# Altium PCB single_coil_driver.PcbDoc
Units mm, origin at the board's own origin, x right, y up, seen from the top; angles counter-clockwise.
Board outline 42 x 32 mm, 2 copper layers (Top Layer, Bottom Layer), stack 1.571 mm thick; 48 components, 25 nets, 165 pads, 53 vias.
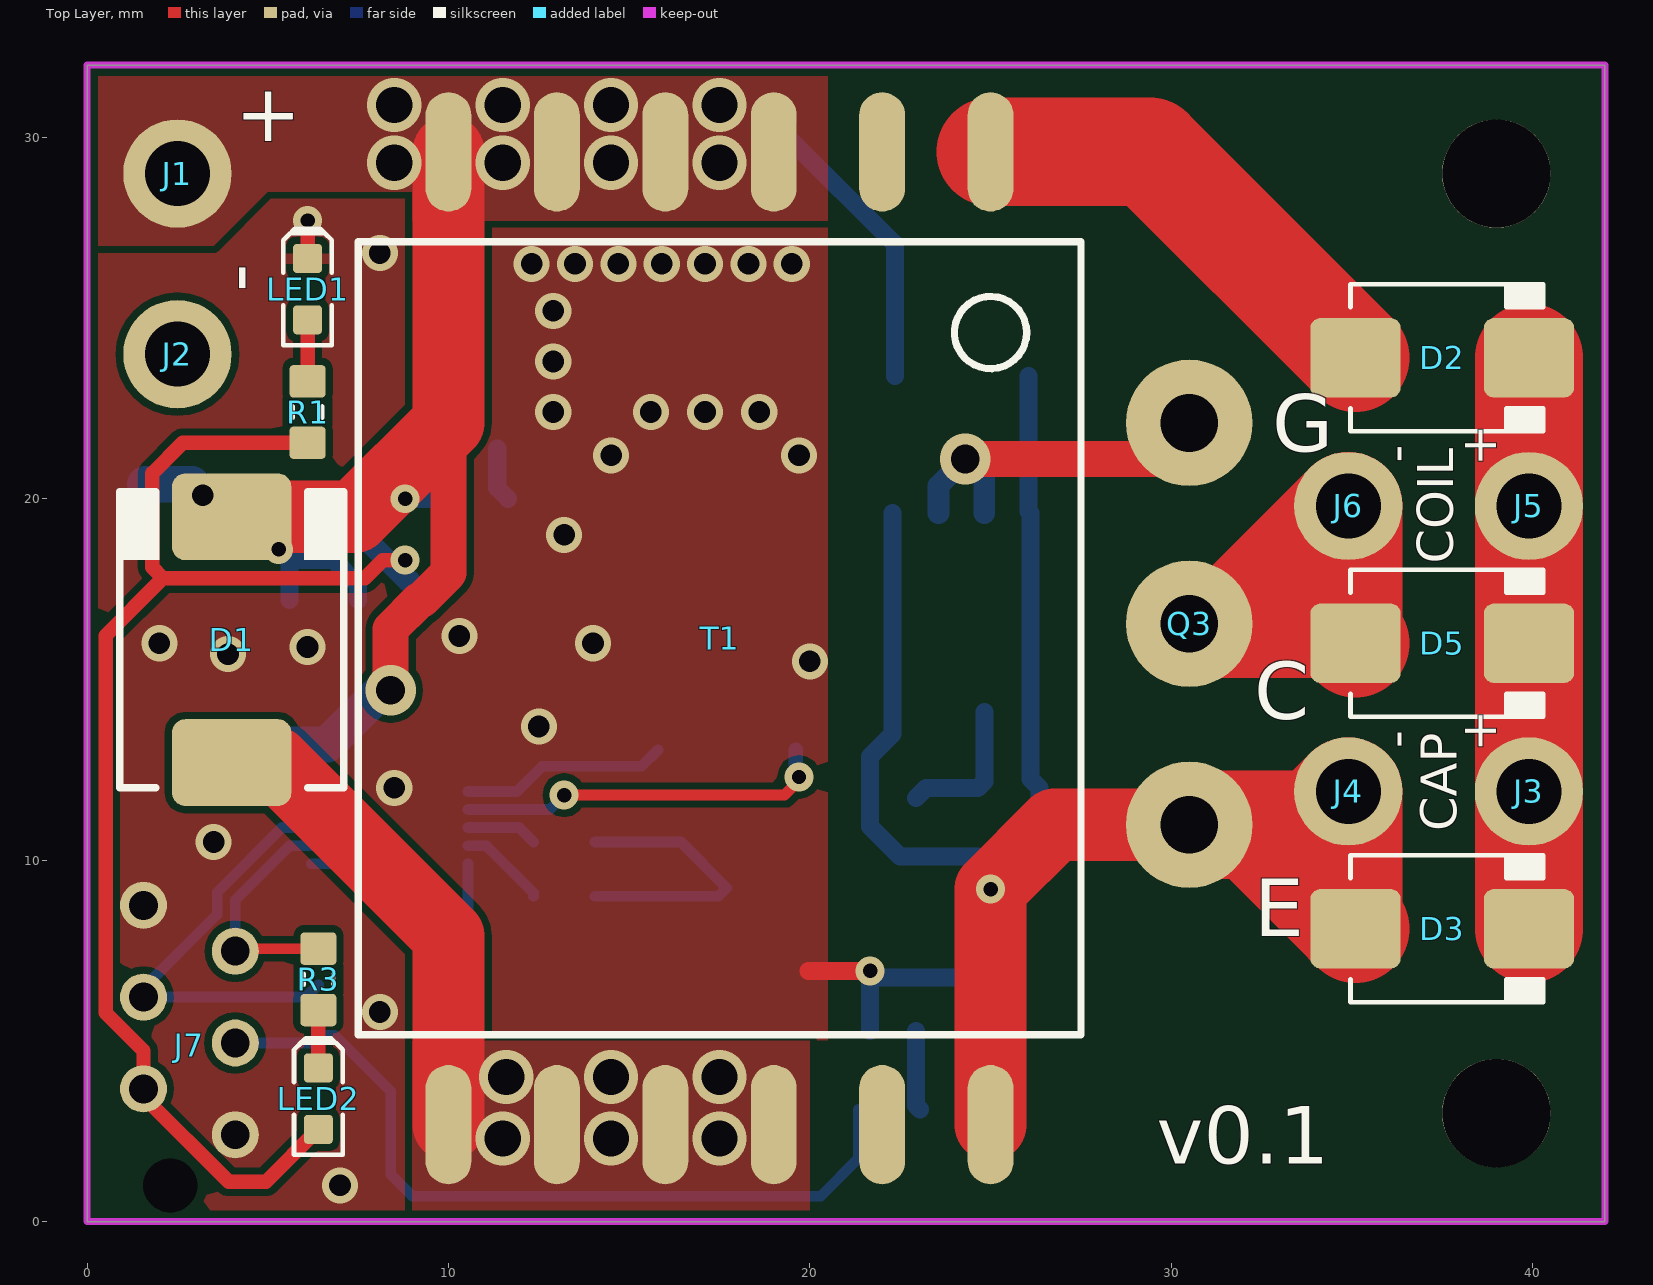
[diagram p0: Top Layer view]
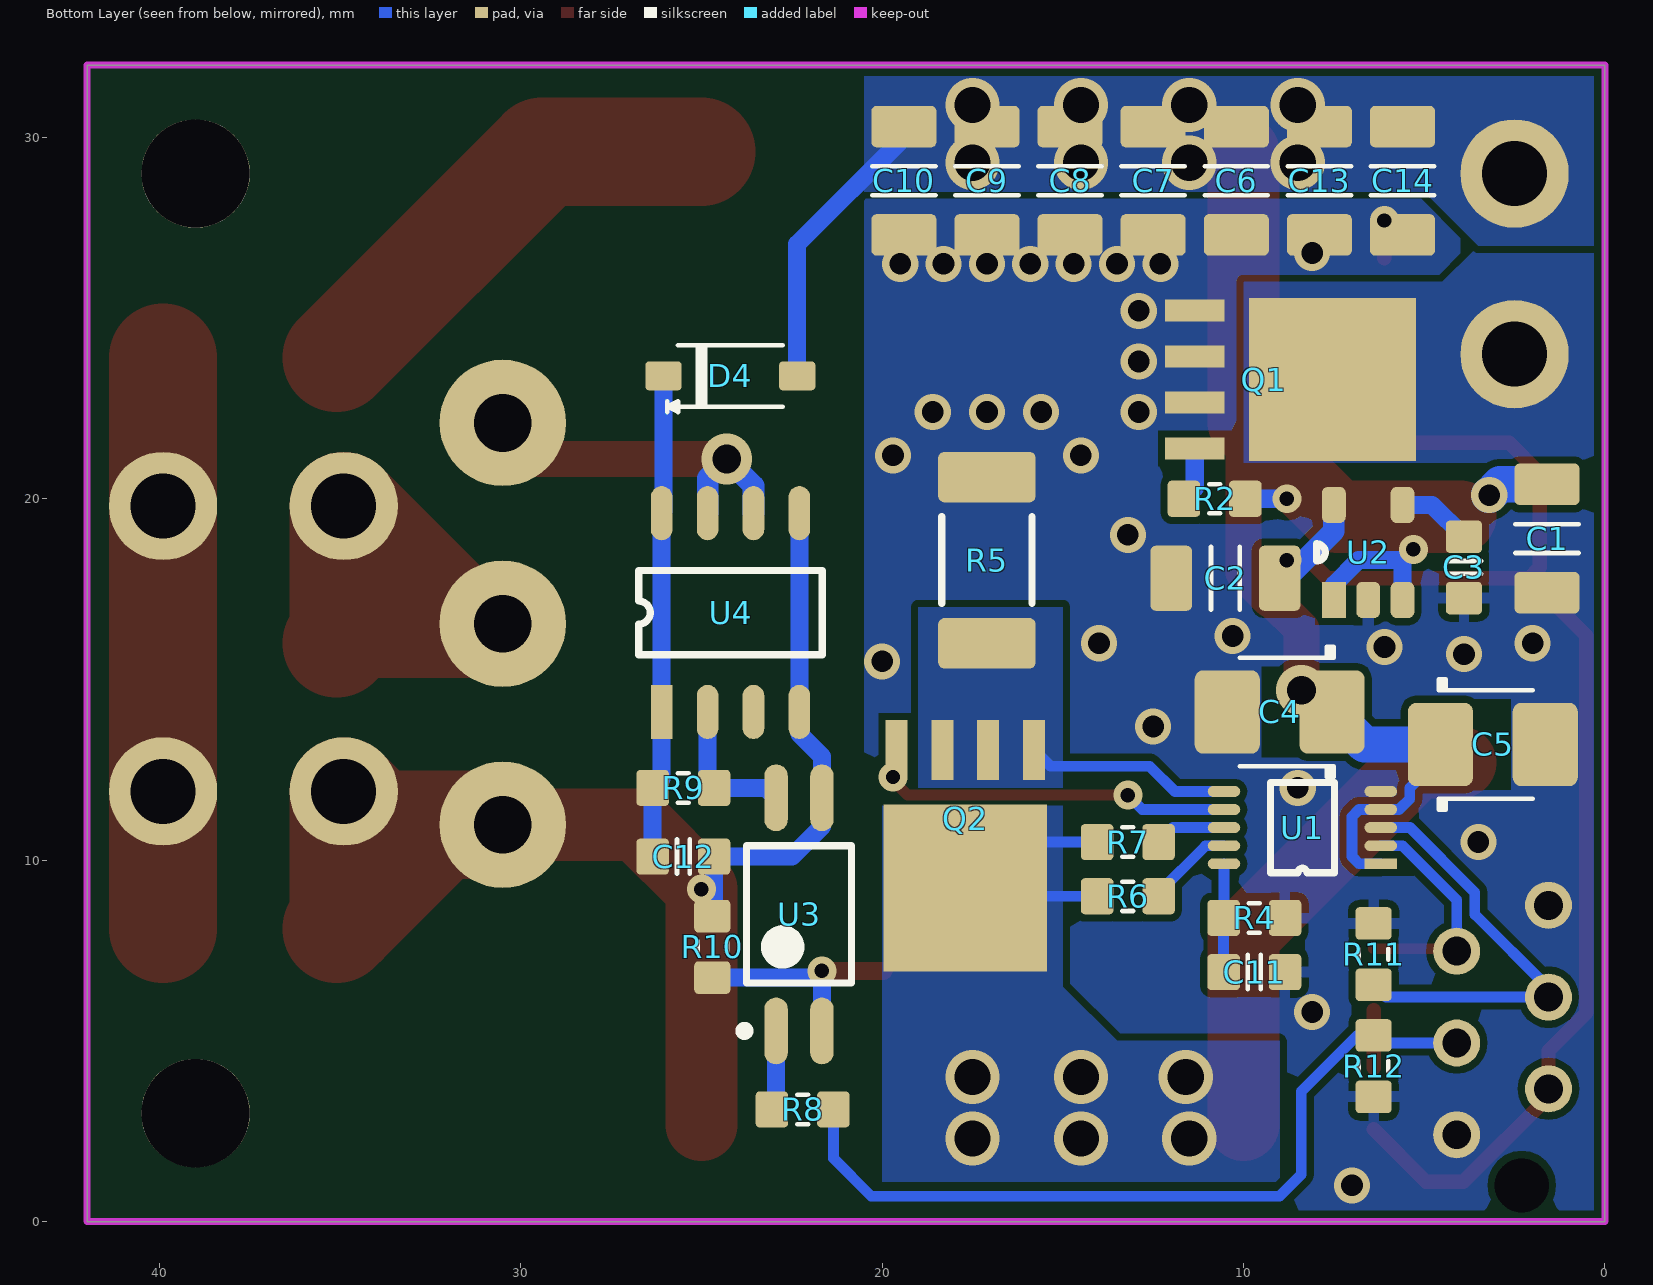
[diagram p1: Bottom Layer view, seen from below]

## Layer stack, top to bottom
Top Solder: solder mask 0.0102, Solder Resist, Dk 3.5
Top Layer: signal copper 0.0356
Dielectric 1: dielectric 1.5, FR-4, Dk 4.8
Bottom Layer: signal copper 0.0356
Bottom Solder: solder mask 0.0102, Solder Resist, Dk 3.5

## Board outline
0,0 42,0 42,32 0,32

## Design rules (kind name [scope] priority, off if disabled: settings)
Clearance [All] p1: gap=0.2
ComponentClearance [All] p1: gap=0.1 collisioncheckmode=3 verticalgap=0.1 showdistances=FALSE
HoleSize [All] p1: absolutevalues=TRUE maxlimit=5 minlimit=0.3 maxpercent=80.000 minpercent=20.000
PolygonConnect PolygonConnectDirectRelief [All vs InComponent('LED1') or InComponent('R11') or InComponent('R12') or InComponent('R4') or InComponent('C11') or InComponent('C3') or InComponent('U2')] p1: connectstyle=Relief reliefconductorwidth=0.3 reliefentries=4 polygonreliefangle="90 Angle" airgapwidth=0.2
PolygonConnect PolygonConnectDirect [All vs IsVia or InNet('12V') or InNet('NetJ2_1') or InNet('NetD1_2') or InNet('NetD1_A') or InNet('NetQ2_S') or InNet('GND')] p2: connectstyle=Direct reliefconductorwidth=0.254 reliefentries=4 polygonreliefangle="90 Angle" airgapwidth=0.254
PolygonConnect [All] p3: connectstyle=Relief reliefconductorwidth=0.254 reliefentries=4 polygonreliefangle="90 Angle" airgapwidth=0.254
RoomDefinition single_coil_driver [InComponentClass('single_coil_driver')] p1: confinementstyle=ConfineIn formatcopy=TRUE lockcomponents=FALSE outline 0,0 50,0 50,50 0,50
RoutingVias [All] p1: holewidth=0.4 width=0.8 viastyle="Through Hole" minholewidth=0.3 minwidth=0.6 maxholewidth=5 maxwidth=10
SolderMaskExpansion SolderMaskExpansionTentedVia [IsVia] p1: expansion=-5
SolderMaskExpansion [All] p2: expansion=0.1
Width [All] p1: maxlimit=10 minlimit=0.2 preferedwidth=0.4
28 further rules are at their usual default settings.

## Components (designator, comment, footprint, x,y, rotation, side; value= is the part's Value field where it differs from the comment)
C1 "1u" CAPC3216X180N 1.6,18.9 r270 bottom
C2 "1u" CAPC3216X180N 10.5,17.8 r0 bottom
C3 "100n" CAPC1608X90N 3.9,18.1 r270 bottom
C4 "10u Ta" CAPMP3528X210N 9,14.1 r0 bottom
C5 "10u Ta" CAPMP3528X210N 3.1,13.2 r180 bottom
C6 "10u" CAPC3216X180N 10.2,28.8 r270 bottom
C7 "10u" CAPC3216X180N 12.5,28.8 r270 bottom
C8 "10u" CAPC3216X180N 14.8,28.8 r270 bottom
C9 "10u" CAPC3216X180N 17.1,28.8 r270 bottom
C10 "10u" CAPC3216X180N 19.4,28.8 r270 bottom
C11 "100p" CAPC1608X90N 9.7,6.9 r180 bottom
C12 "100n" CAPC1608X90N 25.5,10.1 r180 bottom
C13 "10u" CAPC3216X180N 7.9,28.8 r270 bottom
C14 "10u" CAPC3216X180N 5.6,28.8 r270 bottom
D1 "SMCJ120CA" DO-214AB 4,19.5 r270 top
D2 "MURS160" DO-214AA 37.5,23.9 r0 top
D3 "MURS160" DO-214AA 37.5,8.1 r0 top
D4 "" SOD123 24.2,23.4 r180 bottom
D5 "MURS160" DO-214AA 37.5,16 r0 top
J1 "12V_IN" MEDIUM-POWER-VIA 2.5,29 r0 top
J2 "GND_IN" MEDIUM-POWER-VIA 2.5,24 r0 top
J3 "CAP+" MEDIUM-POWER-VIA 39.9,11.9 r0 top
J4 "CAP-" MEDIUM-POWER-VIA 34.9,11.9 r0 top
J5 "COIL+" MEDIUM-POWER-VIA 39.9,19.8 r0 top
J6 "COIL-" MEDIUM-POWER-VIA 34.9,19.8 r0 top
J7 "INPUT" MICRO-MATCH-6 4.1,2.4 r270 top
LED1 "Green" LED-0603-GREEN 6.1,25.8 r90 top
LED2 "Green" LED-0603-GREEN 6.4,3.4 r90 top
Q1 "MOSFET-N" SOT669 8.7,23.3 r180 bottom
Q2 "MOSFET-N" SOT669 17.7,10.4 r270 bottom
Q3 "N-IGBT" TO-247 30.5,22.1 r270 top
R1 "1k" RESC1608X55N 6.1,22.4 r90 top
R2 "1k" RESC1608X55N 10.8,20 r0 bottom
R3 "100k" RESC1608X55N 6.4,6.7 r270 top
R4 "2.49k" RESC1608X55N 9.7,8.4 r0 bottom
R5 "8m" RESC5025X70N 17.1,18.3 r90 bottom
R6 "68k" RESC1608X55N 13.2,9 r0 bottom
R7 "43k" RESC1608X55N 13.2,10.5 r0 bottom
R8 "330R" RESC1608X55N 22.2,3.1 r180 bottom
R9 "10k" RESC1608X55N 25.5,12 r180 bottom
R10 "1R" RESC1608X55N 24.7,7.6 r270 bottom
R11 "10k" RESC1608X55N 6.4,7.4 r90 bottom
R12 "10k" RESC1608X55N 6.4,4.3 r270 bottom
T1 "DA2034-AL" DA2034-AL 25,29.6 r270 top
U1 "LT3750" MSOP-10 6.2,9.9 r0 bottom
U2 "LDO-SOT23-5" SOT23-5 7.5,17.2 r90 bottom
U3 "PC3H7" SOIC127P680X230-4M 22.3,8.5 r90 bottom
U4 "TC1410" SO8 26.1,14.1 r90 bottom

## Footprints (in the part's own frame and the unit in brackets; to place one, negate y for a bottom-side part, rotate by r counter-clockwise, add the part's x,y. Pads: shape width x height; smd on the part's side, far side on the other; paste and mask are expansions set on the pad)
CAPC1608X90N [mm] "Chip Capacitor, Body 1.6x0.8mm, EIA 0603, IPC Medium Density"
  round 0.254 on Mech15: 0(0,0)
  rrect25% 0.9x1 smd: 1(-0.85,0) 2(0.85,0)
  Top Layer pour cut-out: -0.6,0.5 -0.4,0.7 0.4,0.7 0.6,0.5 0.6,-0.5 0.4,-0.7 -0.4,-0.7 -0.6,-0.5
  silkscreen extent -0.18,-0.48 0.18,0.48, body extent -0.85,-0.45 0.85,0.45, height 0.89
CAPC3216X180N [mm] "Chip Capacitor, Body 3.2x1.6mm, 1.8mm H, EIA 1206, IPC Medium Density"
  round 0.508 on Mech15: 0(0,0)
  rrect25% 1.15x1.8 smd: 1(-1.5,0) 2(1.5,0)
  silkscreen extent -0.4,-0.88 0.4,0.88, body extent -1.7,-0.9 1.7,0.9, height 1.8
CAPMP3528X210N [mm] "Molded body capacitor, Body 3.5x2.8mm, 1210, IPC Nominal settings"
  round 0.254 on Mech15: 0(0,0)
  rrect25% 1.8x2.3 smd: 1(-1.45,0) 2(1.45,0)
  Top Layer pour cut-out: -0.508,1.27 0.508,1.27 0.508,-1.27 -0.508,-1.27
  silkscreen extent -1.5,-1.8 1.1,1.8, body extent -1.75,-1.4 1.75,1.4, height 2.1
DA2034-AL [mm]
  oval 3.3x1.27 smd: 1(0,0) 2(0,-3) 3(0,-6) 4(0,-9) 5(0,-12) 6(0,-15) 7(26.92,-15) 8(26.92,-12) 9(26.92,-9) 10(26.92,-6) 11(26.92,-3) 12(26.92,0)
  silkscreen extent 2.48,-17.5 24.44,2.5, body extent -0.82,-17.38 27.83,3.19, height 11.44
DO-214AA [mm] "JEDEC DO214 variation AA. SMB"
  round 0.508 on Mech15: 0(0,0)
  rrect25% 2.5x2.2 smd: A(-2.4,0) K(2.4,0)
  silkscreen extent -2.54,-2.03 2.79,2.03, body extent -2.8,-1.97 2.8,1.98, height 2.62
DO-214AB [mm]
  rrect30% 2.4x3.3 smd: 1(0,0) 2(6.8,0)
  silkscreen extent -0.7,-3.1 7.5,3.1, body extent -0.6,-2.97 7.4,2.98, height 2.2
LED-0603-GREEN [mm]
  round 0.254 on Mech15: 0(0,0)
  rrect25% 0.8x0.8 smd: A(-0.85,0) K(0.85,0)
  Top Layer pour cut-out: -0.5,0.5 0.5,0.5 0.5,-0.5 -0.5,-0.5
  silkscreen extent -1.55,-0.67 1.68,0.67, body extent -0.8,-0.4 0.8,0.4, height 0.75
MEDIUM-POWER-VIA [mm]
  round 3 hole 1.8: 1(0,0)
MICRO-MATCH-6 [mm]
  round 1.3 hole 0.8: 1(0,0) 2(-1.27,-2.54) 3(-2.54,0) 4(-3.81,-2.54) 5(-5.08,0) 6(-6.35,-2.54)
  round 0 hole 1.5 unplated: drill(1.4,-1.8)
  body extent -7.95,-3.77 1.6,1.23, height 4
MSOP-10 [mm]
  rect 0.9x0.3 smd: 1(0,0)
  oval 0.9x0.3 smd: 2(0,-0.5) 3(0,-1) 4(0,-1.5) 5(0,-2) 6(4.34,-2) 7(4.34,-1.5) 8(4.34,-1) 9(4.34,-0.5) 10(4.34,0)
  silkscreen extent 1.28,-2.25 3.06,0.25, body extent -0.27,-2.5 4.63,0.5, height 1.15
RESC1608X55N [mm] "Chip Resistor, Body 1.6x0.8mm, EIA 0603, IPC Medium Density"
  round 0.254 on Mech15: 0(0,0)
  rrect25% 0.9x1 smd: 1(-0.85,0) 2(0.85,0)
  Top Layer pour cut-out: -0.6,0.5 -0.4,0.7 0.4,0.7 0.6,0.5 0.6,-0.5 0.4,-0.7 -0.4,-0.7 -0.6,-0.5
  silkscreen extent -0.15,-0.41 0.15,0.41, body extent -0.87,-0.47 0.88,0.48, height 0.54
RESC5025X70N [mm] "Chip Resistor, Body 5.0x2.5mm, 2010, IPC Medium Density"
  round 0.508 on Mech15: 0(0,0)
  rrect25% 1.4x2.7 smd: 1(-2.3,0) 2(2.3,0)
  silkscreen extent -1.2,-1.25 1.2,1.25, body extent -2.6,-1.35 2.6,1.35, height 0.69
SO8 [mm]
  rect 1.5x0.6 smd: 1(0,0)
  oval 1.5x0.6 smd: 2(0,-1.27) 3(0,-2.54) 4(0,-3.81) 5(5.5,-3.81) 6(5.5,-2.54) 7(5.5,-1.27) 8(5.5,0)
  silkscreen extent 1.58,-4.44 3.92,0.63, body extent -0.15,-4.35 5.63,0.55, height 1.46
SOD123 [mm] "SOD-123; 2 Leads; Body 2.7 x 1.6 mm, (LxW)"
  round 0.508 on Mech15: 0(0,0)
  rrect25% 1x0.8 smd: A(1.85,0) K(-1.85,0)
  silkscreen extent -1.75,-1 1.45,0.85, body extent -1.95,-0.9 1.95,0.9, height 1.18
SOIC127P680X230-4M [mm] "SOIC, 4-Leads, Body 2,60x4,40mm, Pitch 1,27mm, IPC Low Density"
  oval 1.85x0.65 smd: 1(-3.225,0.635) 2(-3.225,-0.635) 3(3.225,-0.635) 4(3.225,0.635)
  silkscreen extent -3.35,-1.45 1.9,1.64, body extent -3.55,-1.3 3.45,1.3, height 2.06
SOT23-5 [mm]
  rect 1x0.66 smd: 1(0,0)
  rrect50% 1x0.66 smd: 2(0,-0.95) 3(0,-1.9) 4(2.63,-1.9) 5(2.63,0)
  silkscreen extent 1.08,0.24 1.55,0.48, body extent 0.1,-2.47 2.6,0.53, height 1.11
SOT669 [mil]
  rect 182x178 smd: D(46,0)
  rect 65x24 smd: G(-104.33,-75) S(-104.33,-25) S(-104.33,25) S(-104.33,75)
  body extent -125,-99 135,97, height 43
TO-247 [mm]
  round 3.5 hole 1.6: C(5.56,0) E(11.12,0) G(0,0)
  body extent -2.44,-2.2 13.56,2.8, height 25.55

## Part data
C1 C2 C6 C7 C8 C9 C10 C13 C14: library part CAPC_10u_1206_16V, "Capacitor SMD Cer 10uF 10% 16V X7R 1206"
C3 C11 C12: library part CAPC_10n_0603_X7R_50V_10%, "Capacitor SMD Cer 10nF 10% 50V X7R 0603"
C4 C5: library part CAPT_47u_1210_6V3, "Capacitor SMD Tantalum 47uF 20% 6.3V 1210"
D1: library part TVS-DIODE
D2 D3 D5: library part DIODE_100V_1.5A_SMA, "Diode SMD 100V 1.5A SMA"
D4: library part DIODE_ZENER_28V_500mW, "Diode Zener SMD 28V 0.5W SOD-123"
J1 J2 J3 J4 J5 J6: library part HEADER-1
J7: library part HEADER-6
LED1 LED2: library part LED_SMD_Green_0603_525nm_350mcd, "LED 0603 SMD Green 525nm 350mcd 20mA"
R1 R2 R3 R4 R6 R7 R8 R9 R10 R11 R12: library part RES_1K_0603_1%, "Resistor SMD chip 1k Ohm 0.1W 1% 0603"
R5: library part RES_10R_2010_5%, "Resistor SMD chip 10 Ohm 0.25W 5% 2010"

## Free pads (board coordinates)
  round 3 hole 3 unplated: 0(39,29) 1(39,3)

## Via types
v1: diameter 1, hole 0.6, Top Layer to Bottom Layer, 29 vias
v2: diameter 1.5, hole 1, Top Layer to Bottom Layer, 14 vias
v3: diameter 0.8, hole 0.4, Top Layer to Bottom Layer, 8 vias
v4: diameter 1.4, hole 0.8, Top Layer to Bottom Layer, 2 vias

## Nets (pads, with @x,y where several pads share a name; then routed paths per layer and width w, separated by ;. In a path a pad name is that pad's centre, name@x,y a point inside that pad or via, vN(x,y) a via of type N, cw(c..) or ccw(c..) an arc to the next point about the centre after c; other vN are vias at no path point)
5V: C2.1 J7.2 LED2.A R1.1 U2.5 | length 39.1
  Top Layer w0.4: 2,17.7 0.51,16.21 0.51,5.775 1.56,4.725 J7.2 1.56,3.455 3.915,1.1 4.95,1.1 LED2.A ; R1.1 2.65,21.55 1.8,20.7 1.8,18.1 2.1,17.8 7.68,17.8 8.18,18.3 v3(8.8,18.3)
  Bottom Layer w0.4: C2.1@8.9,17.7 C2.1
  Bottom Layer w0.6: U2.5 7.5,19.1 C2.1@8.9,17.7
12V: C1.1 C4.1 C5.1 C6.1 C7.1 C8.1 C9.1 C10.1 C13.1 C14.1 D1.1 D4.A J1.1 R2.1 T1.3 T1.4 T1.5 T1.6 U1.1 U1.4 U2.1 U2.3 | length 47.6
  Top Layer w0.5: v3(5.3,18.6) D1.1@5.3,18.7
  Top Layer w1: v4(8.4,14.7) 8.4,16.4 9.2,17.2 9.256,17.2 10,17.944 10,22.1
  Top Layer w2: D1.1 7.4,19.5 10,22.1 T1.6
  Bottom Layer w0.3: C5.1 4.55,12.85 5.4,12 5.4,11.693 5.693,11.4 U1.4 6.8,11.4 7,11.2 7,10.1 6.8,9.9 U1.1
  Bottom Layer w0.5: U2.3 5.6,18.3 6.82,18.3 7.5,17.62 U2.1 ; v3(8.8,20) R2.1 ; C10.1 19.4,30 22.35,27.05 D4.A
  Bottom Layer w1: C1.1 2.9,20.4 v1(3.2,20.1) ; C5.1 6.65,13.2 C4.1 8.15,14.7 v4(8.4,14.7)
  other v2: 8.5,29.3 11.5,29.3 14.5,29.3 17.5,29.3 8.5,30.9 11.5,30.9 14.5,30.9 17.5,30.9
400V: D2.K D3.K D5.K J3.1 J5.1 | length 15.8
  Top Layer w3: D3.K J3.1 D5.K J5.1 D2.K
AGND: C12.2 D3.A J4.1 Q3.E R10.1 T1.12 U3.3 U4.4 U4.5 | length 40
  Top Layer w2: T1.12 v3(25,9.2) 26.78,10.98 Q3.E
  Top Layer w3: Q3.E Q3.E@32.22,10.98 ; D3.A D3.A@34.9,8.3 ; Q3.E@32.22,10.98 D3.A@34.9,8.3 ; Q3.E@32.22,10.98 33.98,10.98 J4.1 D3.A@34.9,8.3
  Bottom Layer w0.5: U4.5 U4.4 22.29,13.49 21.665,12.865 U3.3 21.665,10.935 22.5,10.1 C12.2 24.65,8.5 R10.1 24.7,8.9 v3(25,9.2)
CHARGE: J7.4 R11.1 U1.3 | length 12.1
  Bottom Layer w0.3: U1.3 5.393,10.9 3.6,9.107 3.6,8.5 1.56,6.46 J7.4 6.06,6.21 R11.1
DONE: J7.5 R3.1 U1.2 | length 6.5
  Top Layer w0.3: J7.5 4.17,7.55 R3.1
  Bottom Layer w0.3: J7.5 4.1,8.9 5.6,10.4 U1.2
GND: C1.2 C2.2 C3.2 C4.2 C5.2 C6.2 C7.2 C8.2 C9.2 C10.2 C11.2 C13.2 C14.2 J7.1 J7.6 LED1.K Q1.S R4.1 R5.2 R10.2 R11.2 R12.2 U1.5 U2.2 U3.2 | length 7.5
  Top Layer w0.4: LED1.K v3(6.1,27.7)
  Top Layer w0.5: 19.965,6.935 v3(21.665,6.935)
  Bottom Layer w0.5: U3.2 v3(21.665,6.935) 21.85,6.75 R10.2
  other v1: 7,1 8.1,5.8 3.5,10.5 8.5,12 12.5,13.7 20,15.5 3.9,15.7 6.1,15.9 2,16 14,16 10.3,16.2 13.2,19 14.5,21.2 19.7,21.2 12.9,22.4 15.6,22.4 17.1,22.4 18.6,22.4 12.9,23.8 12.9,25.2 12.3,26.5 13.5,26.5 14.7,26.5 15.9,26.5 17.1,26.5 18.3,26.5 19.5,26.5 8.1,26.8
KICK: J7.3 R8.2 R12.1 | length 22.3
  Bottom Layer w0.3: J7.3 6.19,4.94 R12.1 6.85,5.15 8.4,3.6 8.4,1.3 9,0.7 20.3,0.7 21.35,1.75 R8.2
NetC3_1: C3.1 U2.4 | length 2.1
  Bottom Layer w0.5: C3.1 4.78,19.83 U2.4
NetC11_1: C11.1 R4.2 U1.10 | length 3
  Bottom Layer w0.3: U1.10 10.54,8.41 R4.2 C11.1
NetC12_1: C12.1 D4.K R9.1 U4.1 U4.8 | length 13.4
  Bottom Layer w0.5: D4.K 26.05,19.65 U4.8 U4.1 26.1,12.25 R9.1 C12.1
NetD1_2: D1.2 Q2.D R6.2 R7.2 T1.7 T1.8 T1.9 T1.10 | length 21.1
  Top Layer w2: D1.2 5.2,12.7 10,7.9 T1.7
  Bottom Layer w0.3: R6.2 17.468,9 Q2.D 16.432,10.5 R7.2
  other v2: 11.5,2.3 14.5,2.3 17.5,2.3 11.6,4 14.5,4 17.5,4
NetD2_A: D2.A T1.1 | length 12.5
  Top Layer w3: T1.1 29.4,29.6 D2.A
NetD5_A: D5.A J6.1 Q3.C | length 13
  Top Layer w3: Q3.C Q3.C@31.64,16.54 ; D5.A D5.A@34.9,16.2 ; Q3.C@31.64,16.54 34.56,16.54 D5.A@34.9,16.2 ; Q3.C@31.64,16.54 J6.1 D5.A@34.9,16.2
NetJ2_1: J2.1 Q1.D
NetLED1_A: LED1.A R1.2 | length 1.7
  Top Layer w0.4: R1.2 LED1.A
NetLED2_K: LED2.K R3.2 | length 1.6
  Top Layer w0.4: LED2.K R3.2
NetQ1_G: Q1.G R2.2 | length 1.5
  Bottom Layer w0.5: Q1.G 11.35,20.3 R2.2
NetQ2_G: Q2.G U1.7 | length 10.4
  Top Layer w0.3: v3(13.2,11.8) 19.3,11.8 19.7,12.2 v3(19.7,12.3)
  Bottom Layer w0.3: U1.7 12.8,11.4 v3(13.2,11.8)
  Bottom Layer w0.4: Q2.G 19.605,12.395 v3(19.7,12.3)
NetQ2_S: Q2.S R5.1 U1.6 | length 5.7
  Bottom Layer w0.3: U1.6 11.9,11.9 12.6,12.6 15.345,12.6 Q2.S@15.795,13.05
NetQ3_G: Q3.G U4.6 U4.7 | length 10.1
  Top Layer w1: v4(24.3,21.1) 29.5,21.1 Q3.G
  Bottom Layer w0.6: U4.6 23.56,20.36 v4(24.3,21.1) 24.83,20.57 U4.7
NetR6_1: R6.1 U1.9 | length 2.4
  Bottom Layer w0.3: U1.9 11.047,10.4 12.35,9.097 R6.1
NetR7_1: R7.1 U1.8 | length 2
  Bottom Layer w0.3: U1.8 11.95,10.9 R7.1
NetR8_1: R8.1 U3.1 | length 2.2
  Bottom Layer w0.5: U3.1 22.935,3.215 R8.1
NetR9_2: R9.2 U3.4 U4.2 | length 4
  Bottom Layer w0.5: U3.4 23.21,12 R9.2 24.83,12.18 U4.2
pads on no net: C1.0 C2.0 C3.0 C4.0 C5.0 C6.0 C7.0 C8.0 C9.0 C10.0 C11.0 C12.0 C13.0 C14.0 D2.0 D3.0 D4.0 D5.0 J7.drill LED1.0 LED2.0 R1.0 R2.0 R3.0 R4.0 R5.0 R6.0 R7.0 R8.0 R9.0 R10.0 R11.0 R12.0 T1.2 T1.11 U4.3

## Polygon pours and split planes (outlines as drawn)
NetD1_2 on Bottom Layer "Top Layer-No Net 1" (solid, remove dead copper, pour order 2): 9,1.1 20,1.1 20,11.5 15,11.5 15,6.5 13.5,5 9,5
12V on Bottom Layer "Top Layer-No Net 1" (solid, remove dead copper, pour order 4): 0,27 3.5,27 5,28.5 20.5,28.5 20.5,32 0,32
NetJ2_1 on Bottom Layer "Top Layer-No Net 1" (solid, remove dead copper, pour order 8): 0,27 3.5,27 4.5,26 10,26 10,21 0,21
NetQ2_S on Bottom Layer "Top Layer-No Net 1" (solid, remove dead copper, pour order 10): 15,12 19,12 19,17 15,17
GND on Bottom Layer "Top Layer-No Net 1" (solid, remove dead copper, pour order 14): 0,0 20.5,0 20.5,32 0,32 0,0
12V on Top Layer "Top Layer-No Net 1" (solid, remove dead copper, pour order 6): 0,27 3.5,27 5,28.5 9,28.5 9,27.7 20.5,27.7 20.5,32 0,32
NetD1_2 on Top Layer "Top Layer-No Net 1" (solid, remove dead copper, pour order 12): 9,0 20,0 20,5 9,5
GND on Top Layer "Top Layer-No Net 1" (solid, remove dead copper, pour order 16): 0,0 20.5,0 20.5,32 0,32 0,0

## Keep-outs
Keep-Out Layer:
  the board outline again, w0.2

## Silkscreen, mask and mechanical layers (free items; w line width, h text height)
Top Overlay:
  text "+" at 4.1,29.9 h1.6
  text "-" at 3.7,26.5 h1.6 r270
  text "G" at 32.8,21.3 h1.6
  text "-" at 36.7,21 h1 r90
  text "+" at 39,20.9 h1 r90
  text "COIL" at 37.8,18.2 h1 r90
  text "C" at 32.3,13.9 h1.6
  text "-" at 36.7,13.1 h1 r90
  text "+" at 39,13 h1 r90
  text "CAP" at 37.9,10.8 h1 r90
  text "E" at 32.3,7.9 h1.6
  text "v0.1" at 29.6,1.6 h1.6